# Altium PCB USV_drive_PCB.PcbDoc
Units mm, origin at the board's own origin, x right, y up, seen from the top; angles counter-clockwise.
Board outline 70.8 x 70 mm, 2 copper layers (Top Layer, Bottom Layer), stack 1.57 mm thick; 41 components, 38 nets, 173 pads, 32 vias.
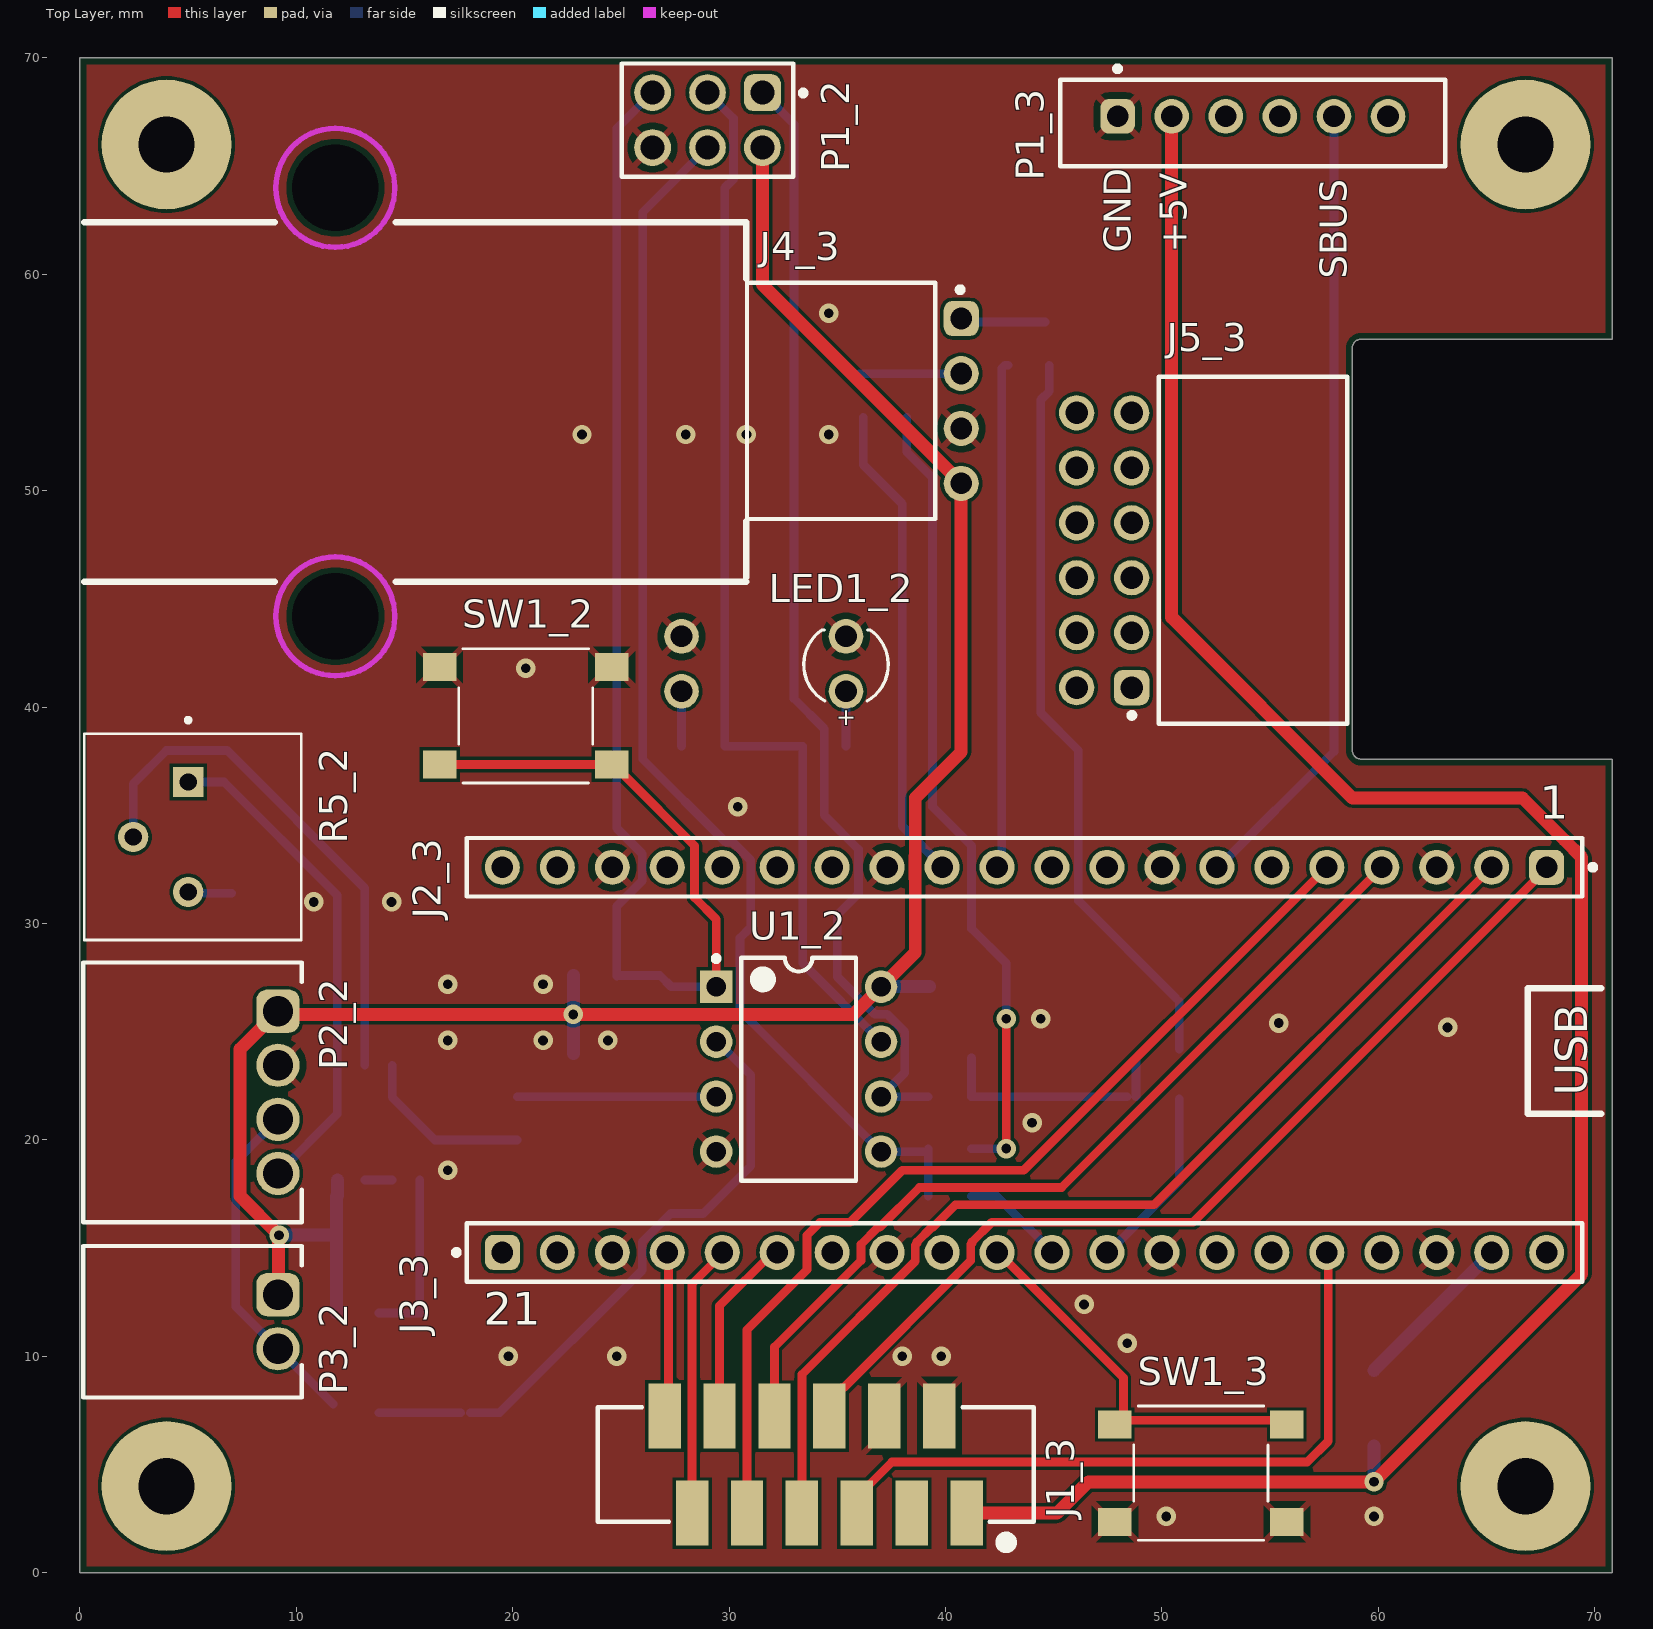
[diagram p0: Top Layer view]
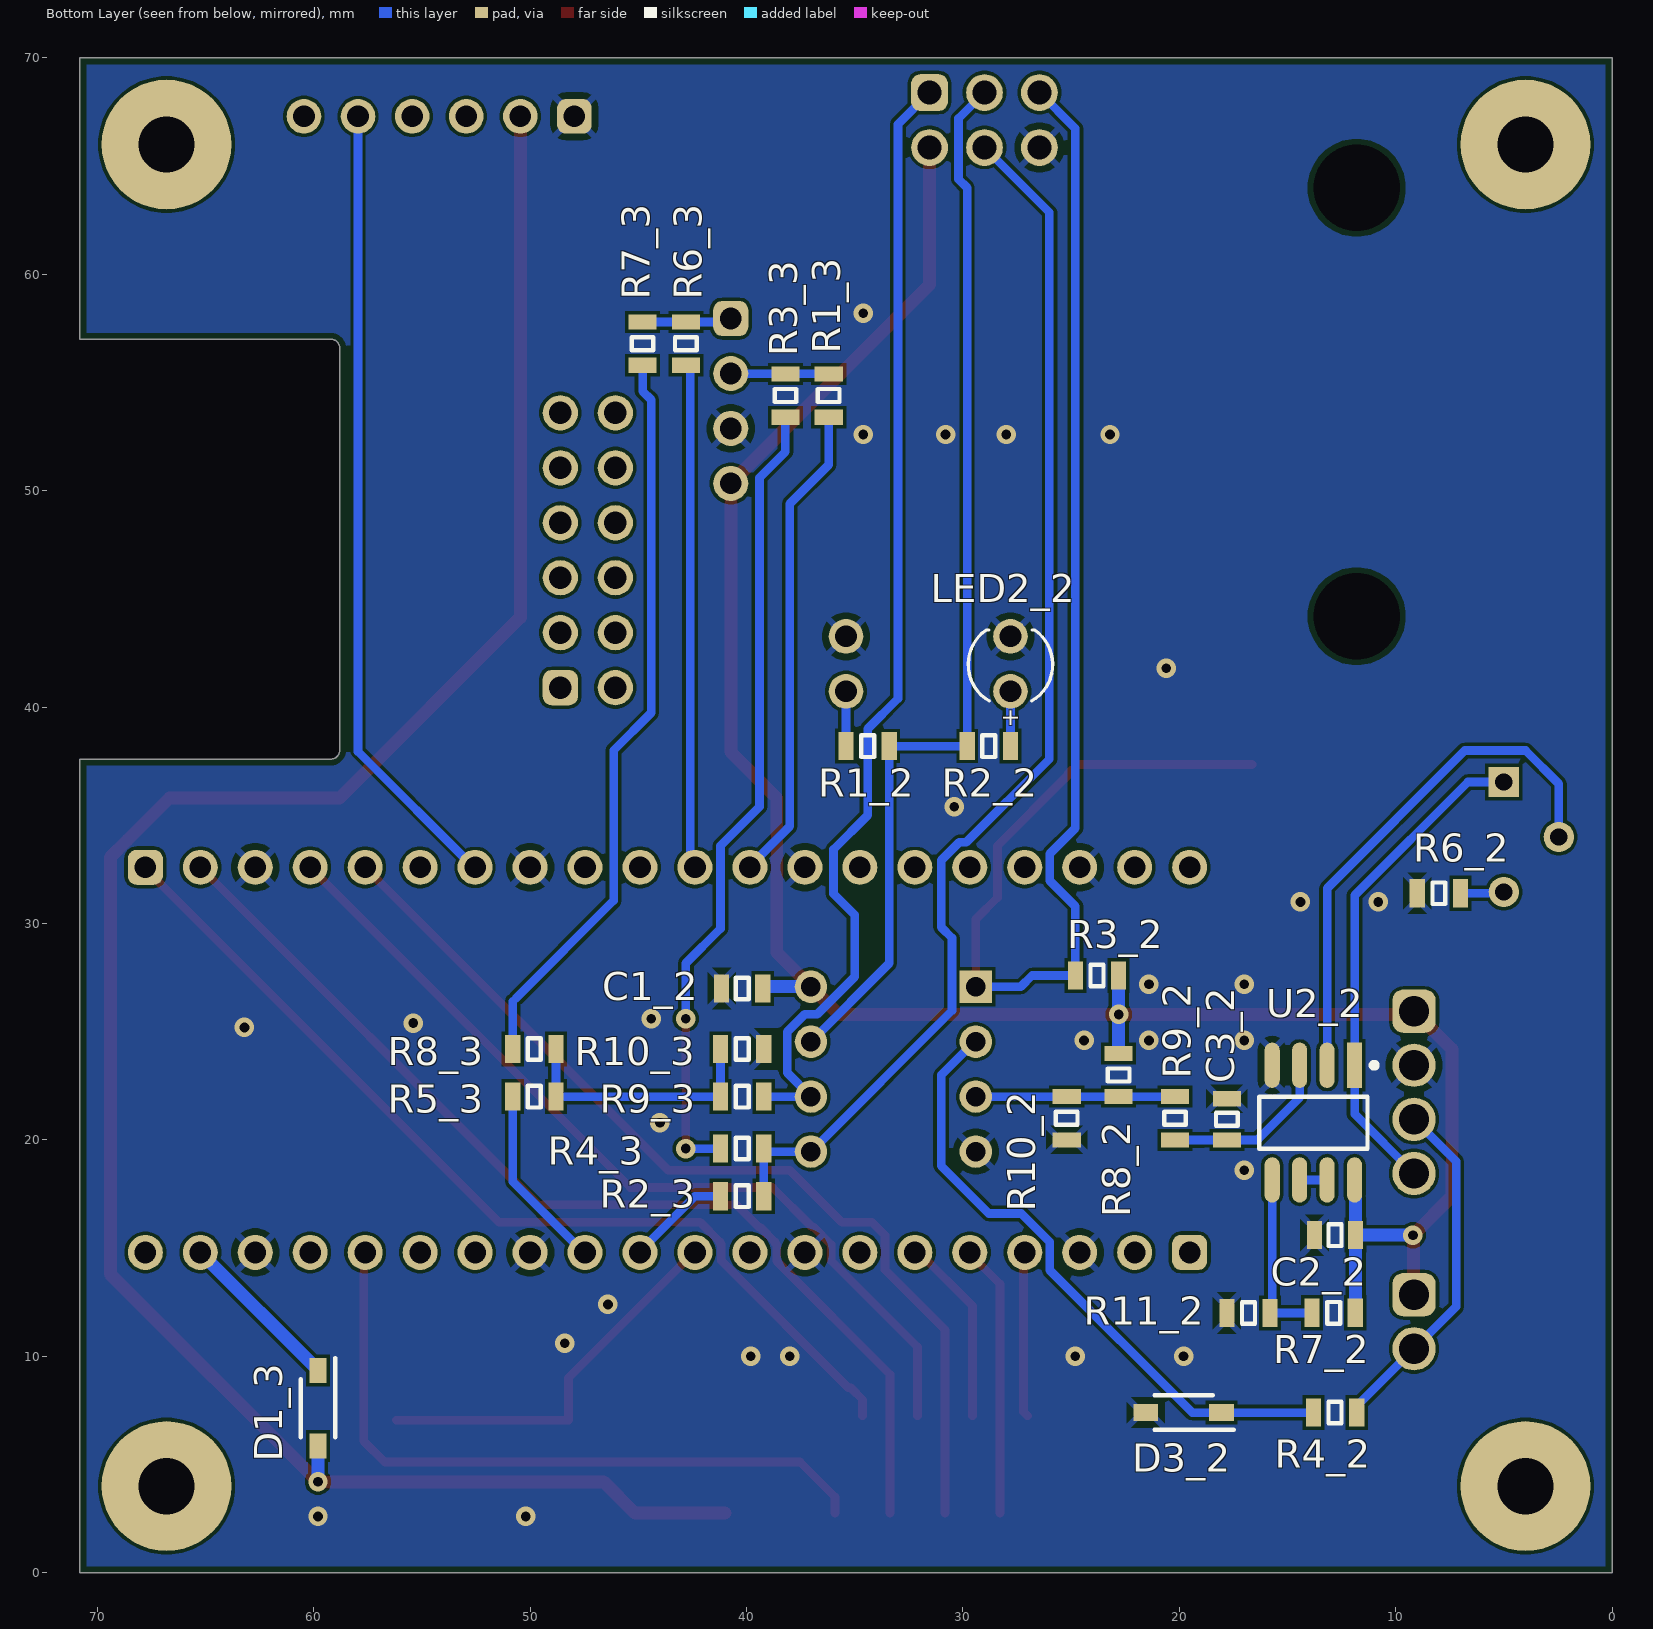
[diagram p1: Bottom Layer view, seen from below]
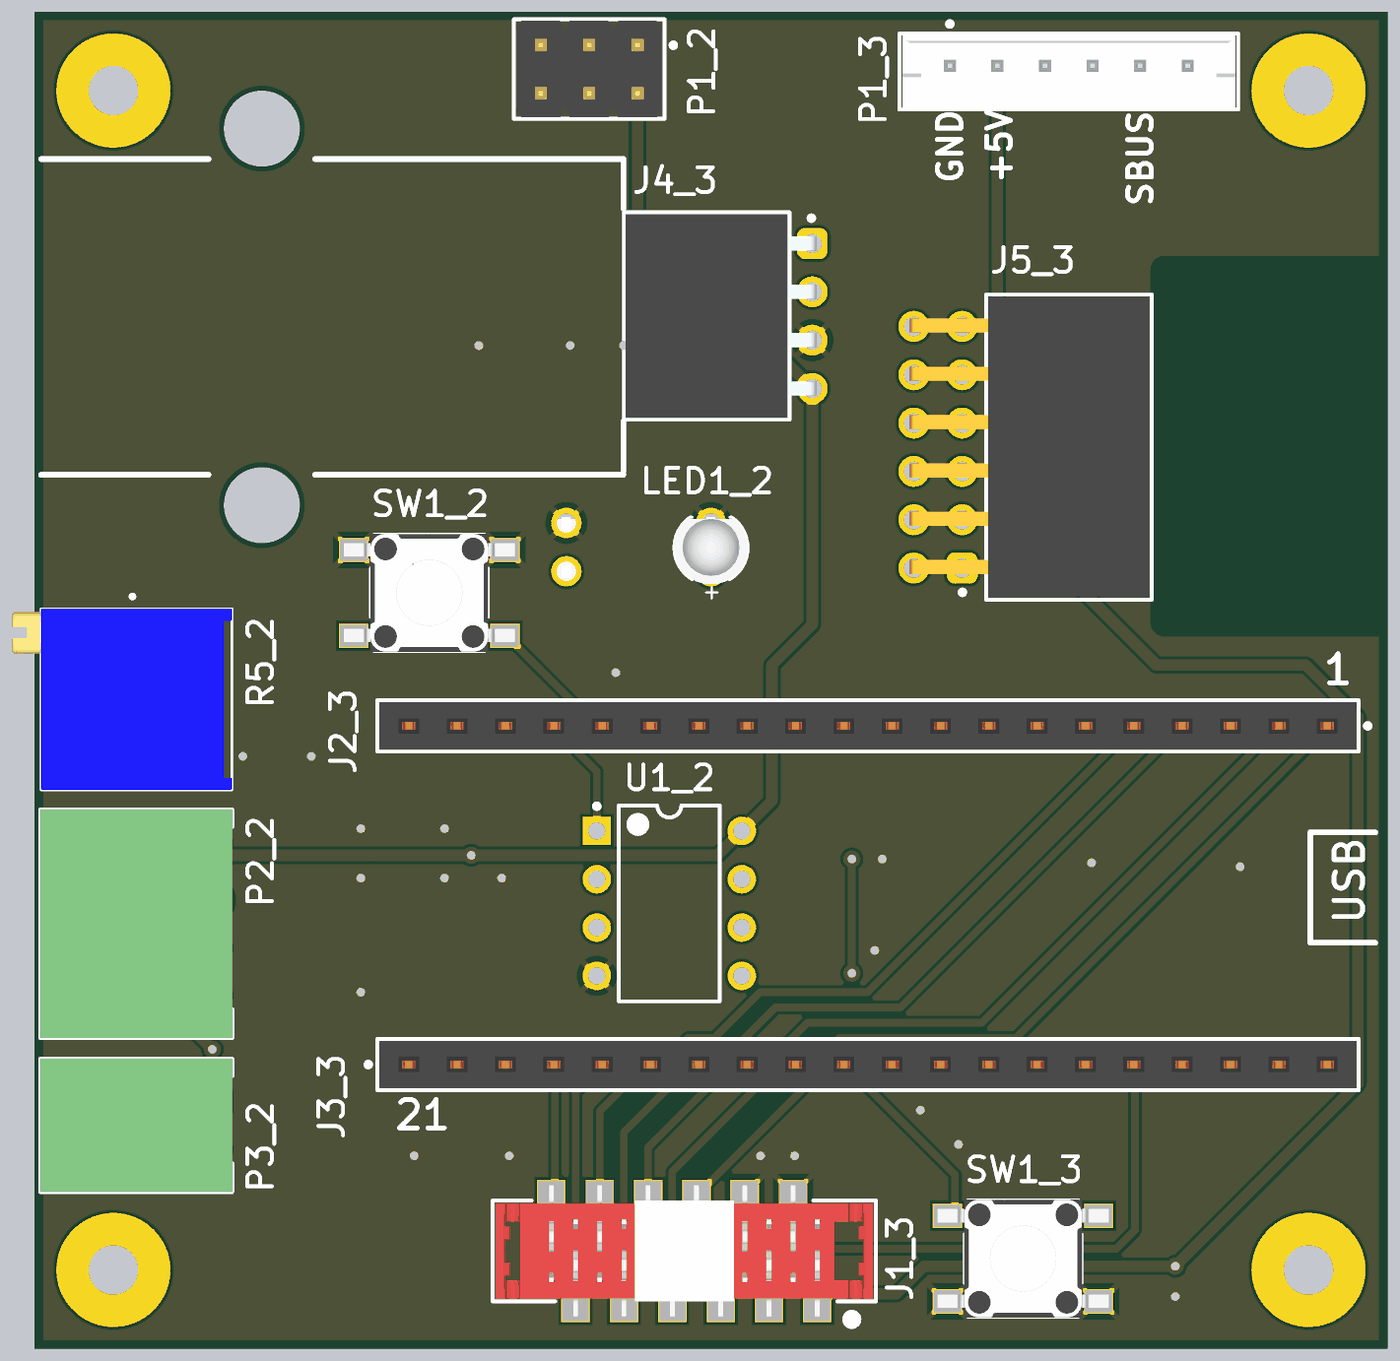
[diagram p2: 3D render of the assembled board from above, using the file's embedded part models]
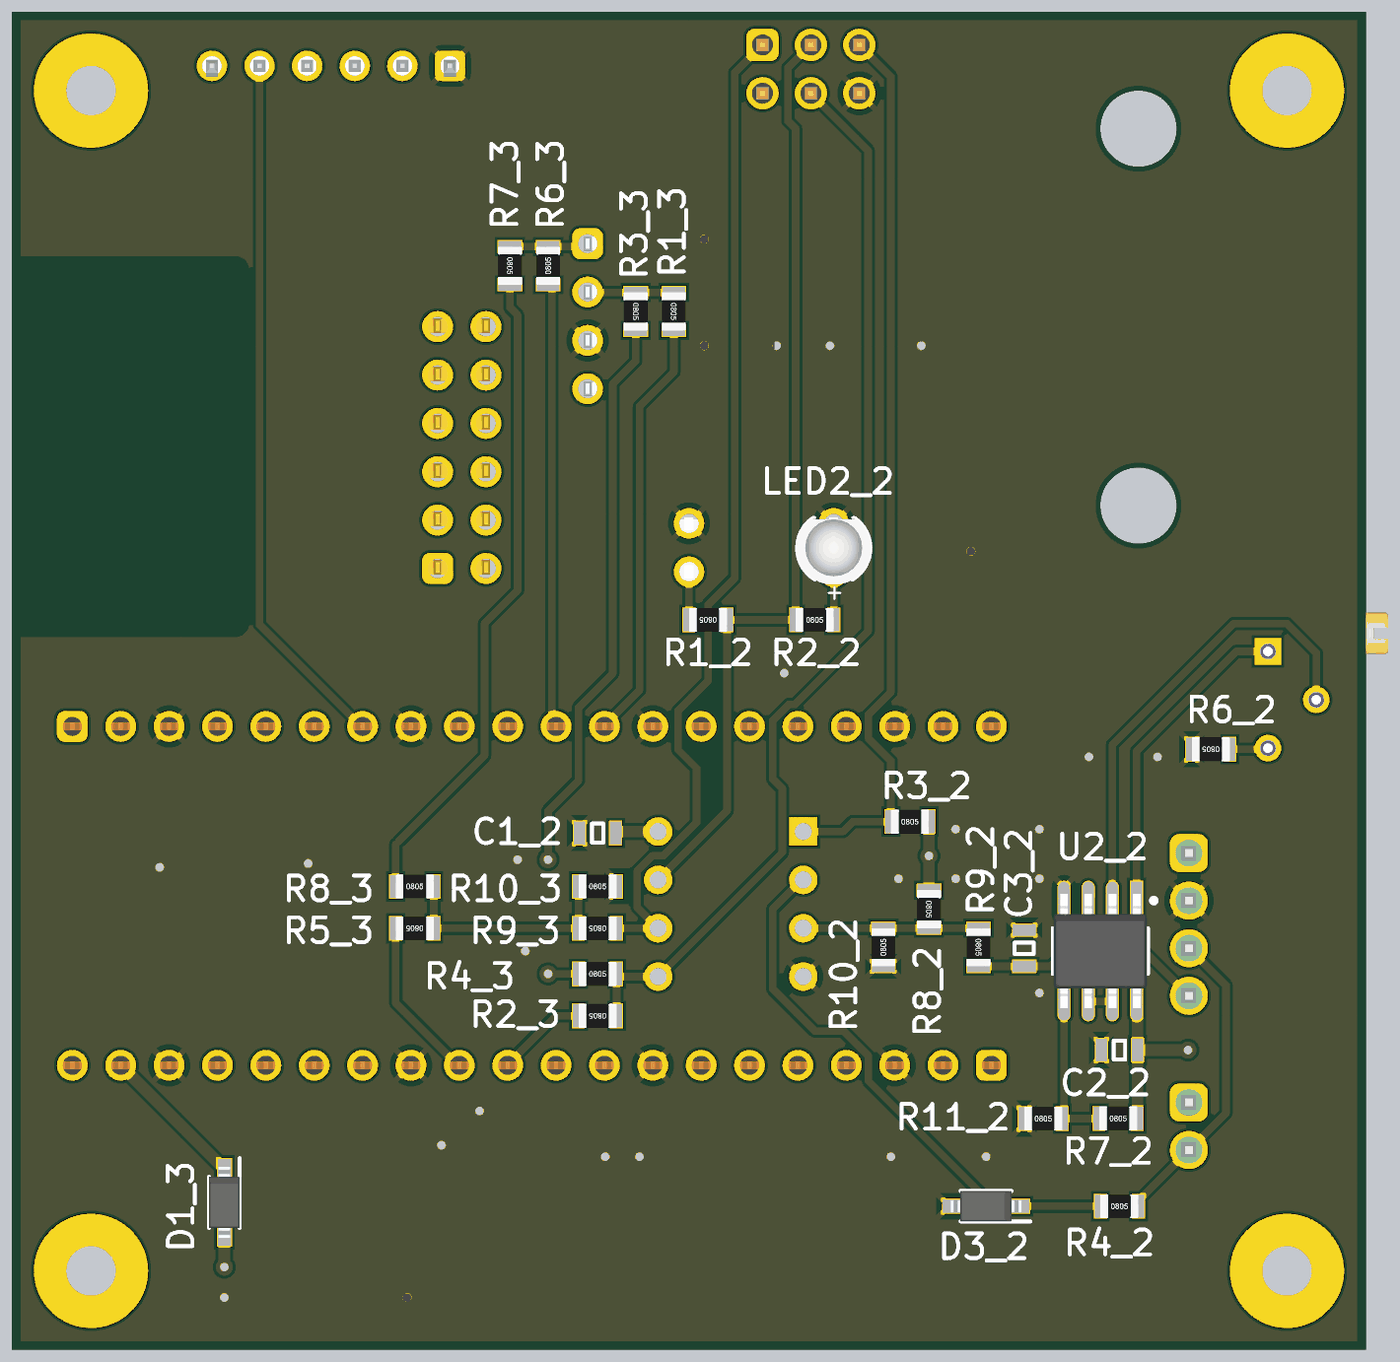
[diagram p3: 3D render of the assembled board from below, using the file's embedded part models]

## Layer stack, top to bottom
Top Solder: solder mask 0.02, Solder Resist, Dk 3.7
Top Layer: signal copper 0.035
Core: core 1.5, FR-4, Dk 4.2
Bottom Layer: signal copper 0.035
Bottom Solder: solder mask 0.02, Solder Resist, Dk 3.7

## Board outline
0,0 0,70 70.8,70 70.8,57 59.2,57 ccw(c59.2,56.6) 58.8,56.6 58.8,38 ccw(c59.2,38) 59.2,37.6 70.8,37.6 70.8,0

## Design rules (kind name [scope] priority, off if disabled: settings)
BoardOutlineClearance [All] p1: gap=0.3 ignorepadtopadclearanceinfootprint=FALSE
Clearance [All] p1: gap=0.15 ignorepadtopadclearanceinfootprint=FALSE except(0.25: Arc-Hole Track-Hole SMDPad-Hole THPad-Hole Via-Hole Fill-Hole Poly-Hole Region-Hole Text-Hole)
ComponentClearance ComponentClearance_Abstandshalter_BT [id = 'Abstandshalter' vs id = 'hc-06'] p1: gap=-0.05 collisioncheckmode=3 verticalgap=0 showdistances=FALSE
ComponentClearance ComponentClearance_Schraube_Abstandshalter [id = 'Schraube_M3x4' vs id = 'Abstandshalter'] p2: gap=0.254 collisioncheckmode=3 verticalgap=-0.05 showdistances=FALSE
ComponentClearance ComponentClearance_Schraube_BT [id = 'Schraube_M3x4' vs id = 'hc-06'] p3: gap=0.254 collisioncheckmode=3 verticalgap=-0.05 showdistances=FALSE
ComponentClearance ComponentClearance_All [All] p4: gap=0.254 collisioncheckmode=3 verticalgap=0.254 showdistances=FALSE
DiffPairsRouting [All] p1: maxlimit=0.25 minlimit=0.25 mostfreqgap=0.25 toplayer_minwidth=0.381 toplayer_maxwidth=0.381 toplayer_prefwidth=0.381 bottomlayer_minwidth=0.381 bottomlayer_maxwidth=0.381 bottomlayer_prefwidth=0.381 maxuncoupledlength=10
FanoutControl [All] p1: bgadir=Out bgaviamode=Centered fanoutstyle=Auto fanoutdirection=Alternating viagrid=0.025
FanoutControl Fanout_BGA [IsBGA] p2: bgadir=Out bgaviamode=Centered fanoutstyle=Auto fanoutdirection=Alternating viagrid=0.025 // Fanout_BGA (Default Rule)
FanoutControl Fanout_LCC [IsLCC] p3: bgadir=Out bgaviamode=Centered fanoutstyle=Auto fanoutdirection=Alternating viagrid=0.025 // Fanout_LCC (Default Rule)
FanoutControl Fanout_SOIC [IsSOIC] p4: bgadir=Out bgaviamode=Centered fanoutstyle=Auto fanoutdirection=Alternating viagrid=0.025 // Fanout_SOIC (Default Rule)
FanoutControl Fanout_Small [(CompPinCount < 5)] p5: bgadir=Out bgaviamode=Centered fanoutstyle=Auto fanoutdirection=OutThenIn viagrid=0.025 // Fanout_Small (Default Rule)
Height [(OnLayer('Bottom Layer')) and (Name = 'LED2_2')] p1: minheight=0 maxheight=25.4 prefheight=12.7
Height "Height Bottom Layer" [(OnLayer('Bottom Layer'))] p2: minheight=0 maxheight=2 prefheight=1
Height "Height Top Layer" [(OnLayer('Top Layer'))] p3: minheight=0 maxheight=10 prefheight=1
HoleSize HoleSize_VIA [IsVia] p1: absolutevalues=TRUE maxlimit=0.45 minlimit=0.3 maxpercent=80.000 minpercent=20.000
HoleSize HoleSize_TH [NOT IsVia] p2: absolutevalues=TRUE maxlimit=5.6 minlimit=0.5 maxpercent=80.000 minpercent=20.000
HoleToHoleClearance [All] p1: gap=0.3 allowstackedmicrovias=FALSE
MinimumAnnularRing MinimumAnnularRing_PTH [Not IsVia] p1: minimumring=0.3
MinimumAnnularRing MinimumAnnularRing_VIA [IsVia] p2: minimumring=0.2
MinimumSolderMaskSliver "MinimumSolderMaskSliver Track and Track" [IsTrack vs IsTrack] p1: minsoldermaskwidth=0
MinimumSolderMaskSliver "MinimumSolderMaskSliver Arc and Track" [IsTrack vs IsArc] p2: minsoldermaskwidth=0
MinimumSolderMaskSliver [All] p3: minsoldermaskwidth=0.1
PasteMaskExpansion [All] p1: expansion=-0.05
PlaneClearance [All] p1: clearance=0.6
PlaneConnect [All] p1: pad.planeconnectstyle=Relief pad.reliefexpansion=0.6 pad.reliefentries=4 pad.reliefconductorwidth=0.3 pad.reliefairgap=0.3 via.planeconnectstyle=Direct via.reliefexpansion=0.6 via.reliefentries=4 via.reliefconductorwidth=0.3 via.reliefairgap=0.3
PolygonConnect [All] p1: thpad.connectstyle=Relief thpad.reliefconductorwidth=0.3 thpad.reliefentries=4 thpad.polygonreliefangle="45 Angle" thpad.airgapwidth=0.3 smdpad.connectstyle=Relief smdpad.reliefconductorwidth=0.3 smdpad.reliefentries=4 smdpad.polygonreliefangle="45 Angle" smdpad.airgapwidth=0.3 via.connectstyle=Direct via.reliefconductorwidth=0.3 via.reliefentries=4 via.polygonreliefangle="45 Angle" via.airgapwidth=0.3
RoutingCorners [All] p1: cornerstyle=45-Degree minsetback=3 maxsetback=6
RoutingVias [All] p1: holewidth=0.45 width=0.9 viastyle="Through Hole" minholewidth=0.3 minwidth=0.85 maxholewidth=0.45 maxwidth=2
SMDEntry [All] p1: side=TRUE corner=TRUE anyangle=FALSE
SMDToCorner [All] p1: distance=157480
ShortCircuit [All] p1: allowed=TRUE
SilkToSilkClearance [All] p1: silktosilkclearance=0.125
SilkToSolderMaskClearance [IsPad] p1: minsilkscreentomaskgap=0.125 clearancetoexposedcopper=TRUE
SolderMaskExpansion [All] p1: expansion=0.05 istentingtop=FALSE
SupplyNets GND [InNet('GND')] p1: voltage=0.000
SupplyNets SupplyNets_1 [InNet('+5V_S')] p2: voltage=5.000
SupplyNets [InNet('+5V_M')] p3: voltage=5.000
UnRoutedNet [not All] p1:
ViasUnderSMD [All] p1: allowed=FALSE
Width [All] p1: maxlimit=5 minlimit=0.2 preferedwidth=0.4
11 further rules are at their usual default settings.

## Classes and differential pairs
component class Connectors: D1_3 J1_3 J2_3 J3_3 J4_3 J5_3 P1_3 R1_3 R2_3 R3_3 R4_3 R5_3 R6_3 R7_3 R8_3 R9_3 R10_3 SW1_3
component class ATtiny_Connections: C1_2 C2_2 C3_2 D1_2 D2_2 D3_2 LED1_2 LED2_2 P1_2 P2_2 P3_2 R1_2 R2_2 R3_2 R4_2 R5_2 R6_2 R7_2 R8_2 R9_2 R10_2 R11_2 SW1_2 U1_2 U2_2

## Components (designator, comment, footprint, x,y, rotation, side; value= is the part's Value field where it differs from the comment)
C1_2 "1uF" SMD-0805 40.2,27 r180 bottom
C2_2 "1uF" SMD-0805 12.8,15.6 r180 bottom
C3_2 "15nF" SMD-0805 17.8,20.95 r270 bottom
D1_3 "BAT54T1G" SOD3716X135N 59.8,7.6 r270 bottom
D3_2 "BAT54T1G" SOD3716X135N 19.8,7.4 r0 bottom
J1_3 "690367291276" 690367291276 34,5 r0 top
J2_3 "61302011821" 61302011821 43.65,32.6 r180 top
J3_3 "61302011821" 61302011821 43.65,14.8 r0 top
J4_3 "613004143121" 613004143121 35.175,54.15 r270 top
J5_3 "613012243121" 613012243121 54.21,47.25 r90 top
LED1_2 "Green, 3.2V, 30°" WL-TMRW_D3.9H5.3 35.4,42 r90 top
LED2_2 "Green, 3.2V, 30°" WL-TMRW_D3.9H5.3 27.8,42 r90 bottom
P1_2 "61300621121" 61300621121 29,67.13 r180 top
P1_3 "68800611622" 68800611622 54.2,67 r0 top
P2_2 "691382010004" 691382010004 5.2,22.2 r270 top
P3_2 "691382010002" 691382010002 5.2,11.6 r270 top
R1_2 "100" R-SMD-0805 34.4,38.2 r0 bottom
R1_3 "0" R-SMD-0805 36.2,54.4 r270 bottom
R2_2 "100" R-SMD-0805 28.8,38.2 r180 bottom
R2_3 "0" R-SMD-0805 40.2,17.4 r0 bottom
R3_2 "10k" R-SMD-0805 23.8,27.6 r180 bottom
R3_3 "0" R-SMD-0805 38.2,54.4 r270 bottom
R4_2 "6,8k" R-SMD-0805 12.8,7.4 r180 bottom
R4_3 "0" R-SMD-0805 40.2,19.6 r180 bottom
R5_2 "200" 3296P-1-201LF 5,34 r270 top
R5_3 "0" R-SMD-0805 49.8,22 r0 bottom
R6_2 "1k" R-SMD-0805 8,31.4 r0 bottom
R6_3 "0" R-SMD-0805 42.8,56.8 r90 bottom
R7_2 "10k" R-SMD-0805 12.865,12.011 r180 bottom
R7_3 "0" R-SMD-0805 44.8,56.8 r270 bottom
R8_2 "1M" R-SMD-0805 22.8,23 r270 bottom
R8_3 "0" R-SMD-0805 49.8,24.2 r180 bottom
R9_2 "100k" R-SMD-0805 20.2,21 r270 bottom
R9_3 "1k" R-SMD-0805 40.2,22 r0 bottom
R10_2 "560k" R-SMD-0805 25.2,21 r90 bottom
R10_3 "2k" R-SMD-0805 40.2,24.2 r180 bottom
R11_2 "10k" R-SMD-0805 16.8,12 r180 bottom
SW1_2 "430182043816" 430182043816 20.6,39.6 r180 top
SW1_3 "430182043816" 430182043816 51.8,4.6 r0 top
U1_2 "ATtiny85-20PU" 8P3 33.21,23.27 r0 top
U2_2 "OPA2186DR" SOIC127P600-8BM 13.8,20.8 r270 bottom

## Footprints (in the part's own frame and the unit in brackets; to place one, negate y for a bottom-side part, rotate by r counter-clockwise, add the part's x,y. Pads: shape width x height; smd on the part's side, far side on the other; paste and mask are expansions set on the pad)
8P3 [mm] "DIP, 8-Pin, Row Spacing 7.62 mm, Pitch 2.54 mm"
  rect 1.5x1.5 hole 0.9: 1(-3.81,3.81)
  round 1.5 hole 0.9: 2(-3.81,1.27) 3(-3.81,-1.27) 4(-3.81,-3.81) 5(3.81,-3.81) 6(3.81,-1.27) 7(3.81,1.27) 8(3.81,3.81)
  silkscreen extent -3.93,-5.15 2.65,5.23, body extent -3.6,-5.15 3.6,5.15, height 5.34
3296P-1-201LF [mm]
  rect 1.4x1.4 / inner round 1.4 / far side rect 1.4x1.4 hole 0.8: 1(-2.54,0)
  round 1.4 hole 0.8: 2(0,-2.54) 3(2.54,0)
  silkscreen extent -5.5,-4.8 4.76,5.23, body extent -4.76,-6.32 4.76,5.23, height 4.96
61300621121 [mm] "Pin Header, pitch 2.54 mm, THT, Vertical, dual row, 6p"
  rrect50% 1.7x1.7 hole 1.1: 1(-2.54,-1.27)
  round 1.7 hole 1.1: 2(-2.54,1.27) 3(0,-1.27) 4(0,1.27) 5(2.54,-1.27) 6(2.54,1.27)
  silkscreen extent -4.54,-2.62 3.96,2.62, body extent -3.81,-2.54 3.81,2.54, height 8.59
61302011821 [mm] "Socket Header, Pitch 2.54 mm, THT, Vertical, single row, 20p"
  rrect50% 1.62x1.62 hole 1: 1(-24.13,0)
  round 1.62 hole 1: 2(-21.59,0) 3(-19.05,0) 4(-16.51,0) 5(-13.97,0) 6(-11.43,0) 7(-8.89,0) 8(-6.35,0) 9(-3.81,0) 10(-1.27,0) 11(1.27,0) 12(3.81,0) 13(6.35,0) 14(8.89,0) 15(11.43,0) 16(13.97,0) 17(16.51,0) 18(19.05,0) 19(21.59,0) 20(24.13,0)
  silkscreen extent -26.39,-1.35 25.78,1.35, body extent -25.65,-1.25 25.65,1.25, height 8.55
68800611622 [mm] "2.50mm ¡°J¡± Type Vertical Male Shrouded Header, 6p"
  rrect50% 1.6x1.6 hole 1: 1(-6.25,0.3)
  round 1.6 hole 1: 2(-3.75,0.3) 3(-1.25,0.3) 4(1.25,0.3) 5(3.75,0.3) 6(6.25,0.3)
  silkscreen extent -8.9,-2 8.9,2.62, body extent -8.75,-1.9 8.75,1.9, height 6.03
430182043816 [mm] "SMD Tact Switch, body 6x6mm"
  rect 1.55x1.3 smd: A1(-3.975,2.25) A2(3.975,2.25) B1(-3.975,-2.25) B2(3.975,-2.25)
  silkscreen extent -3.1,-3.1 3.1,3.1, body extent -4.5,-3.1 4.5,3.1, height 4.3
613004143121 [mm] "Socket Header, Pitch 2.54 mm, THT, Angled, single row, 4p"
  rrect50% 1.62x1.62 hole 1: 1(-3.81,5.55)
  round 1.62 hole 1: 2(-1.27,5.55) 3(1.27,5.55) 4(3.81,5.55)
  silkscreen extent -5.46,-4.35 5.46,5.63, body extent -5.33,-4.25 5.33,5.75, height 2.55
613012243121 [mm] "Socket Header, Pitch 2.54 mm, THT, Angled, dual row, 12p"
  rrect50% 1.63x1.63 hole 1.03: 1(-6.35,5.61)
  round 1.63 hole 1.03: 2(-6.35,8.15) 3(-3.81,5.61) 4(-3.81,8.15) 5(-1.27,5.61) 6(-1.27,8.15) 7(1.27,5.61) 8(1.27,8.15) 9(3.81,5.61) 10(3.81,8.15) 11(6.35,5.61) 12(6.35,8.15)
  silkscreen extent -8.02,-4.35 8.02,5.72, body extent -7.87,-4.25 7.87,8.35, height 5.05
690367291276 [mm] "MiniModule Connectors, PCB Type, Female, SMT, Vertical, 12p"
  rect 1.5x3 smd: 1(6.985,-2.25) 2(5.715,2.25) 3(4.445,-2.25) 4(3.175,2.25) 5(1.905,-2.25) 6(0.635,2.25) 7(-0.635,-2.25) 8(-1.905,2.25) 9(-3.175,-2.25) 10(-4.445,2.25) 11(-5.715,-2.25) 12(-6.985,2.25)
  silkscreen extent -10.07,-2.65 10.07,2.65, body extent -9.92,-3.5 9.92,3.5, height 5.75
691382010002 [mm] "Horizontal PCB Header, pitch 2.5mm, 02p"
  rrect50% 2x2 hole 1.4: 1(-1.25,3.95)
  round 2 hole 1.4: 2(1.25,3.95)
  silkscreen extent -3.5,-5.05 3.5,5.05, body extent -3.5,-5.05 3.5,5.05, height 8.15
691382010004 [mm] "Horizontal PCB Header, pitch 2.5mm, 04p"
  rrect50% 2x2 hole 1.4: 1(-3.75,3.95)
  round 2 hole 1.4: 2(-1.25,3.95) 3(1.25,3.95) 4(3.75,3.95)
  silkscreen extent -6,-5.05 6,5.05, body extent -6,-5.05 6,5.05, height 8.15
R-SMD-0805 [mm] "R SMD 0805 x 024"
  rect 0.7x1.3 smd: 1(-1,0) 2(1,0)
  silkscreen extent -0.3,-0.5 0.3,0.5, body extent -1,-0.62 1,0.63, height 0.6
SMD-0805 [mm]
  rect 0.7x1.3 smd: 1(-0.95,0) 2(0.95,0)
  silkscreen extent -0.3,-0.5 0.3,0.5, body extent -1,-0.63 1,0.63, height 0.6
SOD3716X135N [mm]
  rect 1.15x0.8 smd: 1(-1.75,0) 2(1.75,0)
  silkscreen extent -2.32,-0.8 1.35,0.8, body extent -1.86,-0.8 1.86,0.8, height 1.35
SOIC127P600-8BM [mm] "SOIC, 8-Leads, Body 4.9x3.9mm, Pitch 1.27mm, IPC Low Density"
  rect 2.1x0.7 smd: 1(-2.65,1.905)
  oval 2.1x0.7 smd: 2(-2.65,0.635) 3(-2.65,-0.635) 4(-2.65,-1.905) 5(2.65,-1.905) 6(2.65,-0.635) 7(2.65,0.635) 8(2.65,1.905)
  silkscreen extent -2.77,-2.5 1.2,2.93, body extent -3.01,-2.45 3.01,2.45, height 1.63
WL-TMRW_D3.9H5.3 [mm] "THT Mono-color Round LED, 2-leads"
  round 1.6 hole 1: 1(1.27,0) 2(-1.27,0)
  silkscreen extent -1.72,-1.95 1.57,1.95, body extent -1.97,-1.95 1.6,1.95, height 5.3

## Part data
C1_2 C2_2 C3_2: library part C, "Kondensator"
D1_3 D3_2: "S Prefix for Automotive and Other Applications Requiring Unique Site and Control Change Requirements; AEC-Q101 Qualified and PPAP Capable; Low Forward Voltage 350 mV (Typ) @ IF = 10 mA; Extremely Fast Switching Speed; These Devices are Pb-Free, Halogen Free/BFR Free and are RoHS Compliant", Manufacturer_Name=onsemi, Mouser Part Number=863-BAT54T1G, Arrow Part Number=BAT54T1G, Arrow Price/Stock=https://www.arrow.com/en/products/bat54t1g/on-semiconductor?utm_currency=USD&region=nac, Datasheet Link=https://www.onsemi.com/pub/Collateral/BAT54T1-D.PDF, Geometry.Height=1.35mm, Manufacturer_Part_Number=BAT54T1G, Mouser Price/Stock=https://www.mouser.co.uk/ProductDetail/onsemi/BAT54T1G?qs=vLkC5FC1VN9XK%252B%252BtdP3lYw%3D%3D
J1_3: "WR-MM Mini Module Connector, Female, SMT, with Latch & Polarization, Straight, pitch 2.54mm, 12p", Contact Resistance=10mΩ, Insulation Resistance=1000MΩ, Manufacturer="Wurth Elektronik", Operating Temperature Max=105°C, Operating Temperature Min=-40°C, Rated Current=1.5A, Withstanding Voltage=500VAC, Working Voltage=250VAC, Category="Board-to-Board Connectors", ComponentLink1Description="Website Link", ComponentLink1URL=https://www.we-online.com/redexpert/article/690367291276?ad, ComponentLink2Description="Datasheet Link", ComponentLink2URL=https://www.we-online.com/redexpert/spec/690367291276?ad, Gender=Female, Length=19.84mm, Manufacturer Part Number=690367291276, Match Code=WR-MM, Mount="Surface Mount", Number of Pins=12, Orientation=Straight, Packaging="Tape and Reel", Pitch=2.54mm
J2_3 J3_3: "WR-PHD Socket Header, THT, Vertical, pitch 2.54mm, 1 Row, 20P", Contact Resistance=20mOhm, Manufacturer="Wurth Elektronik", Operating Temperature Max=105°C, Operating Temperature Min=-40°C, Rated Current=3A, Withstanding Voltage=500V, Working Voltage=250V, Category="Board-to-Board Connectors", ComponentLink1Description="Website Link", ComponentLink1URL=https://www.we-online.com/redexpert/article/61302011821?ad, ComponentLink2Description="Datasheet Link", ComponentLink2URL=https://www.we-online.com/redexpert/spec/61302011821?ad, Gender="Socket Header", Manufacturer Part Number=61302011821, Match Code=WR-PHD, Mount="Through Hole", Number of Pins=20, Number of Rows=1, Orientation=Vertical, Packaging=Tray, Pitch=2.54mm
  J3_3: ClassName=RPI_Pico
J4_3: "WR-PHD Socket Header, THT, Angled, pitch 2.54mm, 1 Row, 4P", Contact Resistance=20mOhm, Manufacturer="Wurth Elektronik", Operating Temperature Max=125°C, Operating Temperature Min=-40°C, Rated Current=3A, Withstanding Voltage=500V, Working Voltage=250V, Category="Board-to-Board Connectors", ComponentLink1Description="Website Link", ComponentLink1URL=https://www.we-online.com/redexpert/article/613004143121?ad, ComponentLink2Description="Datasheet Link", ComponentLink2URL=https://www.we-online.com/redexpert/spec/613004143121?ad, Gender="Socket Header", Manufacturer Part Number=613004143121, Match Code=WR-PHD, Mount="Through Hole", Number of Pins=4, Number of Rows=1, Orientation=Angled, Packaging=Tray, Pitch=2.54mm
J5_3: "WR-PHD Socket Header, THT, Angled, pitch 2.54mm, 2 Row, 12P", Contact Resistance=20mOhm, Manufacturer="Wurth Elektronik", Operating Temperature Max=125°C, Operating Temperature Min=-40°C, Rated Current=3A, Withstanding Voltage=500V, Working Voltage=250V, Category="Board-to-Board Connectors", ComponentLink1Description="Website Link", ComponentLink1URL=https://www.we-online.com/redexpert/article/613012243121?ad, ComponentLink2Description="Datasheet Link", ComponentLink2URL=https://www.we-online.com/redexpert/spec/613012243121?ad, Gender="Socket Header", Manufacturer Part Number=613012243121, Match Code=WR-PHD, Mount="Through Hole", Number of Pins=12, Number of Rows=2, Orientation=Angled, Packaging=Tray, Pitch=2.54mm
LED1_2 LED2_2: library part 151034GS03000, "WL-TMRW Mono-color Round Waterclear, THT, D3.9 x H5.3mm, Green, 3.2V, 30°", Emitting Color=Green, Forward Voltage=3.2V, Manufacturer="Wurth Elektronik", Operating Temperature Max=85°C, Operating Temperature Min=-40°C, Category="Signal LEDs", Chip Technology=InGaN, ComponentLink1Description="Website Link", ComponentLink1URL=https://www.we-online.com/redexpert/article/151034GS03000?ad, ComponentLink2Description="Datasheet Link", ComponentLink2URL=https://www.we-online.com/redexpert/spec/151034GS03000?ad, Diameter=3.9mm, Dominant Wavelength=530nm, Height=5.3mm, Luminous Intensity=10000mcd, Manufacturer Part Number=151034GS03000, Match Code=WL-TMRW, Mount="Through Hole", Packaging=Bulk, Peak Wavelength=525nm, Viewing Angle=30°
P1_2: "WR-PHD Pin Header, THT, Vertical, pitch 2.54mm, 2 Row, 6P", Contact Resistance=20mOhm, Manufacturer="Wurth Elektronik", Operating Temperature Max=105°C, Operating Temperature Min=-40°C, Rated Current=3A, Withstanding Voltage=500V, Working Voltage=250V, Category="Board-to-Board Connectors", ComponentLink1Description="Website Link", ComponentLink1URL=https://www.we-online.com/redexpert/article/61300621121?ad, ComponentLink2Description="Datasheet Link", ComponentLink2URL=https://www.we-online.com/redexpert/spec/61300621121?ad, Gender="Pin Header", Manufacturer Part Number=61300621121, Match Code=WR-PHD, Mount="Through Hole", Number of Pins=6, Number of Rows=2, Orientation=Vertical, Packaging=Bag, Pitch=2.54mm
P1_3: "WR-WTB “J” Type THT Vertical Male Shrouded Header, pitch 2.5 mm, 6 pins", Contact Resistance="20 mΩ", Manufacturer="Wurth Elektronik", Max Operating Temperature="85 °C", Min Operating Temperature="-25 °C", Rated Current="3 A", Withstanding Voltage="800 V(AC)", Working Voltage="250 V(AC)", Category="Wire-to-Board Connector", ComponentLink1Description="Website Link", ComponentLink1URL=https://www.we-online.com/redexpert/article/68800611622?ad, ComponentLink2Description="Datasheet Link", ComponentLink2URL=https://www.we-online.com/redexpert/spec/68800611622?ad, Gender=Male, Height="6 mm", Length="17.5 mm", Manufacturer Part Number=68800611622, Match Code=WR-WTB, Mount="Through Hole", Number of Pins=6, Number of Rows=1, Orientation=Vertical, Packaging=Bag, Pitch="2.5 mm", Width="3.8 mm"
P2_2: "WR-TBL Series 382 Horizontal PCB Header, THT, pitch 2.5mm, 04p", Manufacturer="Wurth Elektronik", Max Operating Temperature=105°C, Min Operating Temperature=-40°C, Rated Current=12A, Working Voltage=300V, Application=Pluggable, Category="Terminal Block", ComponentLink1Description="Website Link", ComponentLink1URL=https://www.we-online.com/redexpert/article/691382010004?ad, ComponentLink2Description="Datasheet Link", ComponentLink2URL=https://www.we-online.com/redexpert/spec/691382010004?ad, Manufacturer Part Number=691382010004, Match Code=WR-TBL, Modularity=No, Mount="Through Hole", Number of Pins=4, Number of Rows=1, Orientation=Horizontal, Packaging=Box, Pitch=2.5mm, System="Pluggable Connector"
P3_2: "WR-TBL Series 382 Horizontal PCB Header, THT, pitch 2.5mm, 02p", Manufacturer="Wurth Elektronik", Max Operating Temperature=105°C, Min Operating Temperature=-40°C, Rated Current=12A, Working Voltage=300V, Application=Pluggable, Category="Terminal Block", ComponentLink1Description="Website Link", ComponentLink1URL=https://www.we-online.com/redexpert/article/691382010002?ad, ComponentLink2Description="Datasheet Link", ComponentLink2URL=https://www.we-online.com/redexpert/spec/691382010002?ad, Manufacturer Part Number=691382010002, Match Code=WR-TBL, Modularity=No, Mount="Through Hole", Number of Pins=2, Number of Rows=1, Orientation=Horizontal, Packaging=Box, Pitch=2.5mm, System="Pluggable Connector"
R1_2 R1_3 R2_2 R2_3 R3_2 R3_3 R4_2 R4_3 R5_3 R6_2 R6_3 R7_2 R7_3 R8_2 R8_3 R9_2 R9_3 R10_2 R10_3 R11_2: library part R, "Widerstand"
R5_2: library part 3296P-1-201LF, "Trimmer Potentiometers / Lead Sealed Type Multiturn Trimming Potentiometer / Resistance range: 200 Ohm / 25 Turns", Manufacturer Part Nr.=3296P-201LF, PartNumber=PV36P???C01B00, Resistance Code=***, Supplier Part Number 1=3296P-201LF-ND, ComponentLink1Description=Datasheet, ComponentLink1URL=https://www.bourns.com/docs/Product-Datasheets/3296.pdf, Hinweis!="PartNumber muss beim Plazieren auf den Wiederstandswert laut Datenblatt abgeändert werden.", Supplier 1=DigiKey, Supplier 2=Mouser, Supplier Part Number 2=652-3296P-1-201LF, Tol=+-10%, Turns=25
SW1_2 SW1_3: "WS-TASV SMT Tact Switch, 6mm x 6mm, 160gf, SPST-NO, 12V, 50mA", Manufacturer="Wurth Elektronik", Max Operating Temperature=85°C, Min Operating Temperature=-40°C, Rated Current=50mA, Rated Voltage (DC)=12V, Category="Tact Switch", Circuit=SPST-NO, ComponentLink1Description="Website Link", ComponentLink1URL=https://www.we-online.com/redexpert/article/430182043816?ad, ComponentLink2Description="Datasheet Link", ComponentLink2URL=https://www.we-online.com/redexpert/spec/430182043816?ad, Contact Material="Stainless Steel", Contact Plating=Silver, Height=4.3mm, Length=6mm, Manufacturer Part Number=430182043816, Match Code=WS-TASV, Mount="Surface Mount", Operation Force=160gf, Packaging="Tape and Reel", Terminal Material="Copper Alloy", Terminal Plating=Silver, Washable=No, Width=6mm
U1_2: "8-bit AVR Microcontroller, 20MHz, 2.7-5.5V, 8K Flash, 512 Bytes EEPROM, 512 Bytes SRAM, Industrial Grade (-40°C to 85°C), 8-Lead PDIP, Pb-Free", Code_JEDEC=MS-001-BA, ComponentLink1Description="Manufacturer URL", ComponentLink1URL=http://www.atmel.com/, ComponentLink2Description="ATtiny25/45/85 Datasheet", ComponentLink2URL=http://www.atmel.com/dyn/resources/prod_documents/doc2586.pdf, ComponentLink3Description="ATtiny25/45/85 Summary", ComponentLink3URL=http://www.atmel.com/dyn/resources/prod_documents/2586S.pdf, DatasheetVersion="revN, Apr-2011", PackageDescription="8-Lead, 0.300\" Wide Body, Plastic Dual In-Line Package (PDIP)", PackageReference=8P3, PackageVersion="revB, Jan-2002"
U2_2: library part OPA2186, "The OPA186, OPA2186, and OPA4186 (OPAx186) / are low-power, 24-V, rail-to-rail input and output, zerodrift operational amplifiers (op amps). These op amps / feature only 10 µV of offset voltage (maximum) and / 0.04 µV/°C of offset voltage drift over temperature / (maximum).", Supplier Part Number 1=296-OPA2186DRCT-ND, ComponentLink1Description=DataSheet, ComponentLink1URL=https://www.ti.com/lit/gpn/opa2186, PartNumber=OPA2186DR, Supplier 1=Digikey, Supplier 2=Mouser, Supplier Part Number 2=595-OPA2186DR, V+_Max=+12V, V-_Min=-12V

## Free pads (board coordinates)
  round 6 hole 2.6: 0(4,4) 0(4,66) 0(66.8,4) 0(66.8,66)
  round 0 hole 4 unplated: 0(11.8,44.2) 0(11.8,64)

## Via types
v1: diameter 0.9, hole 0.45, Top Layer to Bottom Layer, tented both sides, 32 vias

## Nets (pads, with @x,y where several pads share a name; then routed paths per layer and width w, separated by ;. In a path a pad name is that pad's centre, name@x,y a point inside that pad or via, vN(x,y) a via of type N, cw(c..) or ccw(c..) an arc to the next point about the centre after c; other vN are vias at no path point)
3V3_O: J1_3.5 J3_3.16 | length 32.3
  Top Layer w0.4: J1_3.5 35.905,3.5 37.521,5.116 56.716,5.116 57.68,6.08 J3_3.16@57.68,14.8
+5V_M: C1_2.2 C2_2.2 J4_3.4 P1_2.2 P2_2.1 P3_2.1 R3_2.2 R7_2.2 R8_2.1 U1_2.8 U2_2.8 | length 101.8
  Top Layer w0.6: P3_2.1 9.175,12.875 9.175,15.575 v1(9.2,15.6) 7.4,17.4 7.4,24.2 P2_2.1 9.3,25.8 v1(22.8,25.8) 35.74,25.8 U1_2.8 38.6,28.66 38.6,32.058 38.58,32.078 38.58,33.122 38.6,33.142 38.6,35.8 40.725,37.925 J4_3.4 31.54,59.525 P1_2.2
  Bottom Layer w0.6: v1(9.2,15.6) C2_2.2 ; R7_2.2@11.85,12 11.85,15.4 C2_2.2 ; U2_2.8 11.895,17.423 11.85,17.378 C2_2.2 ; R8_2.1 v1(22.8,25.8) R3_2.2 ; U1_2.8 C1_2.2@39.25,27.08
+5V_S: D1_3.2 J1_3.1 P1_3.2 | length 100.6
  Top Layer w0.6: J1_3.1 45.15,2.75 46.6,4.2 v1(59.8,4.2) 69.4,13.8 69.4,33.059 68.6,33.859 66.659,35.8 58.8,35.8 50.45,44.15 P1_3.2
  Bottom Layer w0.6: v1(59.8,4.2) D1_3.2
ATt_TX_3V3: R5_3.1 R8_3.2 R9_3.2 R10_3.1 | length 11.4
  Bottom Layer w0.4: 41.2,22.75 41.2,23.05 ; R10_3.1@41.2,23.8 41.2,23.05 ; 48.4,22 R9_3.2 41.2,23.05 ; R5_3.1 48.8,23.05 ; 48.8,22.751 48.8,23.05 ; R8_3.2@48.8,23.801 48.8,23.05
BT_RX_ATt_TX_3V3: R7_3.2 R8_3.1 | length 34.2
  Bottom Layer w0.4: R7_3.2 44.8,54.6 44.4,54.2 44.4,39.74 46.14,38 46.14,31.06 50.644,26.556 ; R8_3.1 50.8,26.4
BT_TX_ATt_RX: R3_3.2 R4_3.1 | length 37.3
  Top Layer w0.4: v1(42.8,19.6) v1(42.8,25.6)
  Bottom Layer w0.4: R3_3.2 38.2,51.8 39.4,50.6 39.4,35.4 41.2,33.6 41.2,29.768 42.8,28.168 v1(42.8,25.6) ; R4_3.1@41.2,19.6 v1(42.8,19.6)
Control_Out: P2_2.4 R5_2.1 U2_2.1 | length 23.1
  Bottom Layer w0.4: R5_2.1 6.66,36.54 11.895,31.305 U2_2.1 11.895,21.195 P2_2.4
DC_0..5V: C3_2.2 R9_2.2 U2_2.3 | length 8.1
  Bottom Layer w0.4: U2_2.3 14.435,21.965 16.4,20 C3_2.2 18.85,20 R9_2.2
ERROR1_I: J1_3.11 J3_3.5 | length 12.7
  Top Layer w0.4: J1_3.11 28.285,13.345 J3_3.5@29.74,14.8
ERROR2_I: J1_3.12 J3_3.4 | length 7.6
  Top Layer w0.4: J1_3.12 27.2,7.435 J3_3.4@27.2,14.8
Error_Filtered_In: D3_2.1 R4_2.1 U1_2.2 | length 28.7
  Bottom Layer w0.4: R4_2.1@13.8,7.4 D3_2.1@17.6,7.4 ; D3_2.1 19.4,7.4 25.98,13.98 25.98,15.28 27.3,16.6 28.8,16.6 31,18.8 31,23 29.46,24.54 U1_2.2
Error_In: P2_2.3 P3_2.2 R4_2.2 | length 15.8
  Bottom Layer w0.4: P2_2.3 7.2,19 7.2,12.3 11.65,7.85 R4_2.2@11.7,7.8
GND: C1_2.1 C2_2.1 C3_2.1 D3_2.2 J1_3.2 J1_3.4 J2_3.3 J2_3.8 J2_3.13 J2_3.18 J3_3.3 J3_3.8 J3_3.13 J3_3.18 J4_3.3 LED1_2.1 LED2_2.1 P1_2.6 P1_3.1 P2_2.2 R6_2.2 R10_2.1 R10_3.2 R11_2.1 SW1_2.B1 SW1_2.B2 SW1_3.B1 SW1_3.B2 U1_2.4 U2_2.4
  other v1: 50.2,2.6 59.8,2.6 19.8,10 24.8,10 38,10 39.8,10 48.4,10.6 46.4,12.4 17,18.6 44,20.8 17,24.6 21.4,24.6 24.4,24.6 63.2,25.2 55.4,25.4 44.4,25.6 17,27.2 21.4,27.2 10.8,31 14.4,31 30.4,35.4 20.6,41.8 23.2,52.6 28,52.6 30.8,52.6 34.6,52.6 34.6,58.2
IRQ_O: J1_3.10 J3_3.6 | length 8.8
  Top Layer w0.4: J1_3.10 29.555,12.333 32.022,14.8 J3_3.6@32.28,14.8
MISO: P1_2.1 R9_3.1 U1_2.6 | length 52.9
  Bottom Layer w0.4: P1_2.1 33,66.94 33,40.4 34.4,39 34.4,35 35.98,33.42 35.98,31.38 35,30.4 35,27.544 36.734,25.81 37.306,25.81 38.12,24.996 38.12,23.1 U1_2.6 R9_3.1
MOSI: P1_2.4 R2_3.1 R4_3.2 U1_2.5 | length 57.2
  Bottom Layer w0.4: P1_2.4 26,62.86 26,37.6 29.84,33.76 30.16,33.76 31,32.92 31,29.83 30.5,29.33 30.5,25.98 U1_2.5 39.141,19.46 R4_3.2@39.2,19.401 ; R2_3.1 R4_3.2
nRESET: P1_2.5 R3_2.1 SW1_2.A1 SW1_2.A2 U1_2.1 | length 67.2
  Top Layer w0.4: SW1_2.A2 SW1_2.A1 ; SW1_2.A1@24.9,37.15 25.15,36.9 25.15,36.85 28.4,33.6 28.4,31.2 29.4,30.2 U1_2.1
  Bottom Layer w0.4: R3_2.1@24.8,27.557 24.8,30.8 25.98,31.98 25.98,33.22 24.8,34.4 24.8,66.74 P1_2.5 ; R3_2.1 26.8,27.6 27.32,27.08 U1_2.1
OPA_A-: R5_2.2 U2_2.2 | length 24.6
  Bottom Layer w0.4: R5_2.2 2.46,36.46 4,38 6.8,38 13.165,31.635 U2_2.2
OPA_B_+: R7_2.1 R11_2.2 U2_2.5 | length 8.1
  Bottom Layer w0.4: R7_2.1@13.8,12 R11_2.2@15.705,12 ; U2_2.5 15.705,12.095 R11_2.2
OPA_B_-: U2_2.6 U2_2.7 | length 1.3
  Bottom Layer w0.4: U2_2.7 U2_2.6
"PIO 0 RX_SBUS": J2_3.7 P1_3.5 | length 36.9
  Bottom Layer w0.4: J2_3.7@52.6,32.6 57.95,37.95 P1_3.5
"PIO 1 RX_ATt": J3_3.12 R5_3.2 | length 8.5
  Bottom Layer w0.4: J3_3.12@47.52,14.8 50.8,18.08 R5_3.2@50.8,21.91
"PIO 2 TX_ATt": J3_3.11 R2_3.2 | length 4.9
  Bottom Layer w0.4: R2_3.2 42.38,17.4 J3_3.11@44.98,14.8
Poti_R: R5_2.3 R6_2.1 | length 2
  Bottom Layer w0.4: R5_2.3 5.06,31.4 R6_2.1
PWM_Out: R8_2.2 R9_2.1 R10_2.2 U1_2.3 | length 9.1
  Bottom Layer w0.4: R9_2.1 R8_2.2 R10_2.2 29.06,22 U1_2.3@29.2,22.14
R_LED: LED1_2.2 R1_2.2 | length 2.5
  Bottom Layer w0.4: R1_2.2 LED1_2.2
R_LED_A: LED2_2.2 R2_2.2 | length 2.5
  Bottom Layer w0.4: R2_2.2 LED2_2.2
RUN: J3_3.10 SW1_3.A1 SW1_3.A2 | length 18.1
  Top Layer w0.4: J3_3.10@42.44,14.8 48.225,9.015 48.225,7.05 SW1_3.A2@56.175,7.05
RXD_Out: J4_3.1 R6_3.2 R7_3.1 | length 3.9
  Bottom Layer w0.4: J4_3.1 40.885,57.8 R6_3.2 R7_3.1@44.6,57.8
SCK: P1_2.3 R1_2.1 R2_2.1 U1_2.7 | length 49.6
  Bottom Layer w0.4: P1_2.3 30.2,67.2 30.2,64.4 29.8,64 R2_2.1 R1_2.1 33.4,28.16 U1_2.7
TXD_In: J4_3.2 R1_3.1 R3_3.1 | length 4.7
  Bottom Layer w0.4: R1_3.1@36,55.4 R3_3.1 J4_3.2@40.705,55.4
"UART0 CTS": J1_3.8 J2_3.4 | length 40.8
  Top Layer w0.4: J1_3.8 32.095,10.435 36.09,14.43 36.09,15.17 36.88,15.96 36.96,15.96 38.8,17.8 45.36,17.8 J2_3.4@60.13,32.57
"UART0 RTS": J1_3.9 J2_3.5 | length 45
  Top Layer w0.4: J1_3.9 30.825,11.225 33.6,14 33.6,15.6 34.2,16.2 35.6,16.2 38,18.6 43.62,18.6 J2_3.5@57.59,32.57
"UART0 RX": J1_3.7 J2_3.2 | length 48.4
  Top Layer w0.4: J1_3.7 33.365,9.165 38.6,14.4 38.6,15.14 38.68,15.22 38.68,15.28 39.36,15.96 39.42,15.96 40.46,17 49.64,17 J2_3.2@65.21,32.57
"UART0 TX": J1_3.6 J2_3.1 | length 44.6
  Top Layer w0.4: J1_3.6 34.635,8 35.185,8.55 35.29,8.55 41.17,14.43 41.17,15.17 41.22,15.22 41.22,15.28 42.14,16.2 51.44,16.2 J2_3.1@67.84,32.6
"UART1 RX": J2_3.12 R1_3.2 | length 22.3
  Bottom Layer w0.4: R1_3.2 36.2,51.2 38,49.4 38,34.5 J2_3.12@39.9,32.6
"UART1 TX": J2_3.11 R6_3.1 | length 23.5
  Bottom Layer w0.4: J2_3.11@42.44,32.6 42.6,32.76 42.6,55.65 42.75,55.8 R6_3.1@42.9,55.8
VSYS: D1_3.1 J3_3.19 | length 7.7
  Bottom Layer w0.6: D1_3.1@59.795,9.355 J3_3.19
pads on no net: J1_3.3 J2_3.6 J2_3.9 J2_3.10 J2_3.14 J2_3.15 J2_3.16 J2_3.17 J2_3.19 J2_3.20 J3_3.1 J3_3.2 J3_3.7 J3_3.9 J3_3.14 J3_3.15 J3_3.17 J3_3.20 J5_3.1 J5_3.2 J5_3.3 J5_3.4 J5_3.5 J5_3.6 J5_3.7 J5_3.8 J5_3.9 J5_3.10 J5_3.11 J5_3.12 P1_3.3 P1_3.4 P1_3.6

## Polygon pours and split planes (outlines as drawn)
GND on Bottom Layer "GND_L02_P000" (solid, remove dead copper, pour order 0): 0,70 0,0 70.8,0 70.8,70
GND on Top Layer "GND_L01_P001" (solid, remove dead copper, pour order 1): 0,70 0,0 70.8,0 70.8,70

## Keep-outs
Top Layer:
  circle w0.254: c11.8,64 r2.75
  circle w0.254: c11.8,44.2 r2.75

## Silkscreen, mask and mechanical layers (free items; w line width, h text height)
Top Overlay:
  circle w0.5: c42.8,1.4 r0.25
  lines w0.3: 0.2,45.8 9,45.8 ; 0.2,62.4 9,62.4 ; 14.6,45.8 30.8,45.8 ; 14.6,62.4 30.8,62.4 30.8,59.8 ; 30.8,46 30.8,48.6 ; 70.3,21.2 66.9,21.2 66.9,27 70.3,27
  text "GND" at 48.55,61 h1.25 r90
  text "+5V" at 51.15,61 h1.25 r90
  text "SBUS" at 58.55,59.8 h1.25 r90
  text "1" at 67.454,34.854 h1.52
  text "USB" at 69.65,22.05 h1.5 r90
  text "21" at 18.65,11.45 h1.5
Board Shape:
  lines w0.254: 0,70 70.8,70 70.8,57 59.2,57 ccw(c59.2,56.6) 58.8,56.6 58.8,38 ; 70.8,0 70.8,37.6 59.2,37.6 cw(c59.2,38) 58.8,38 ; 58.8,38 58.8,38
  lines w0.3: 0,70 0,0 70.8,0
Top Component Outline:
  lines w0.3: -8.2,45.85 -0.4,45.85 -0.4,62.25 -8.2,62.25 -8.2,45.85

## Text inside footprints (layer, text, board x,y; h text height)
LED1_2: Top Overlay "+" at 35.75,39.05 h0.8 r90
LED2_2: Bottom Overlay "+" at 27.45,39.05 h0.8 r270